# Altium PCB AudioUFO.PcbDoc
Units mil, origin at the board's own origin, x right, y up, seen from the top; angles counter-clockwise.
Board outline 5000 x 5000 mil, 2 copper layers (Top Layer, Bottom Layer), stack 61.7 mil thick; 31 components, 4 nets, 234 pads, 75 vias.
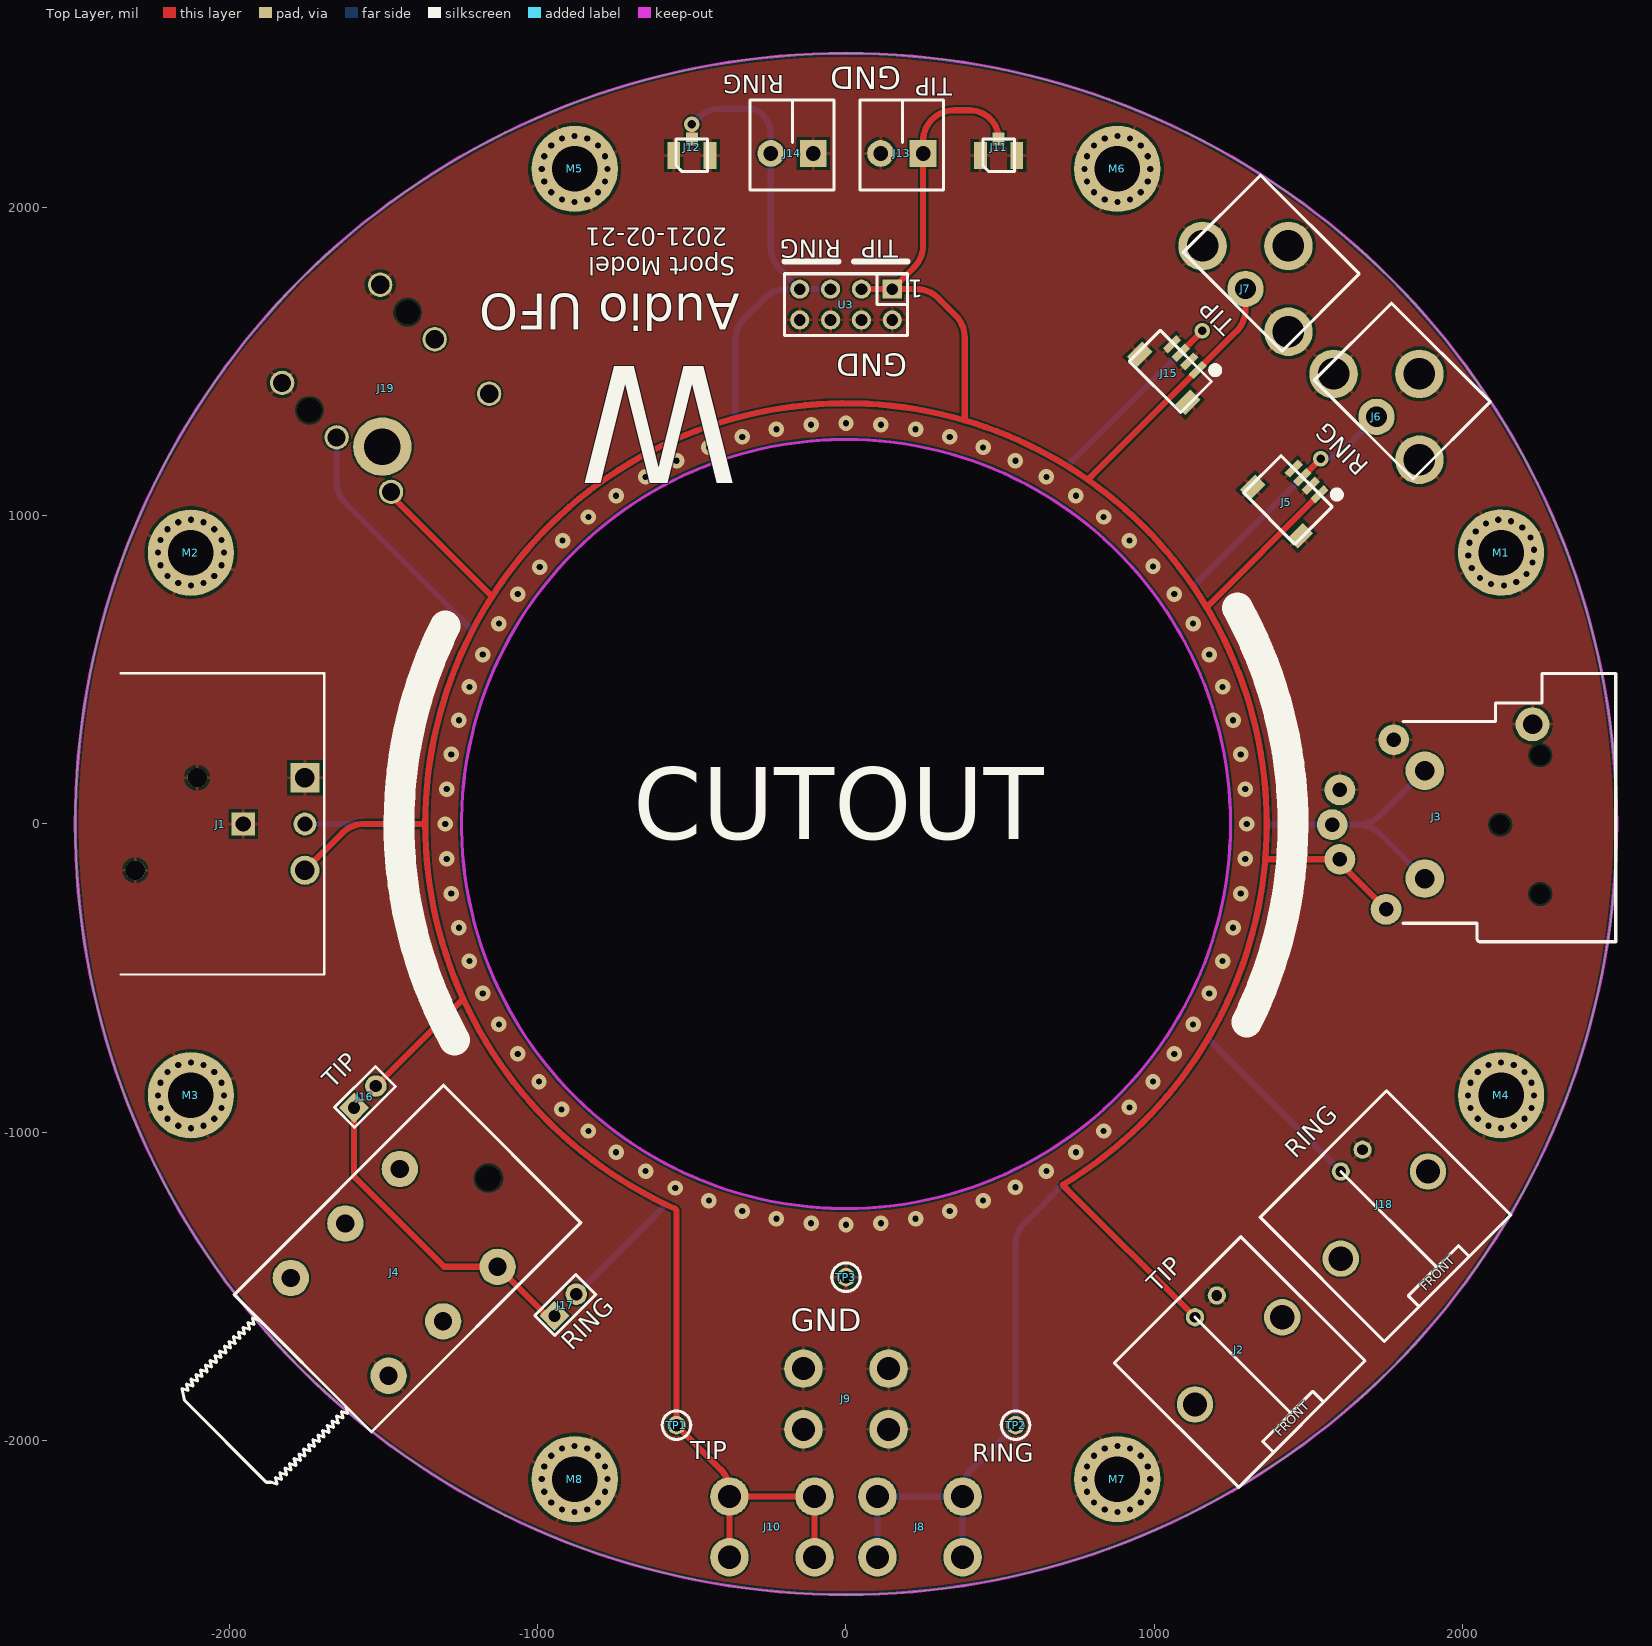
[diagram p0: Top Layer view]
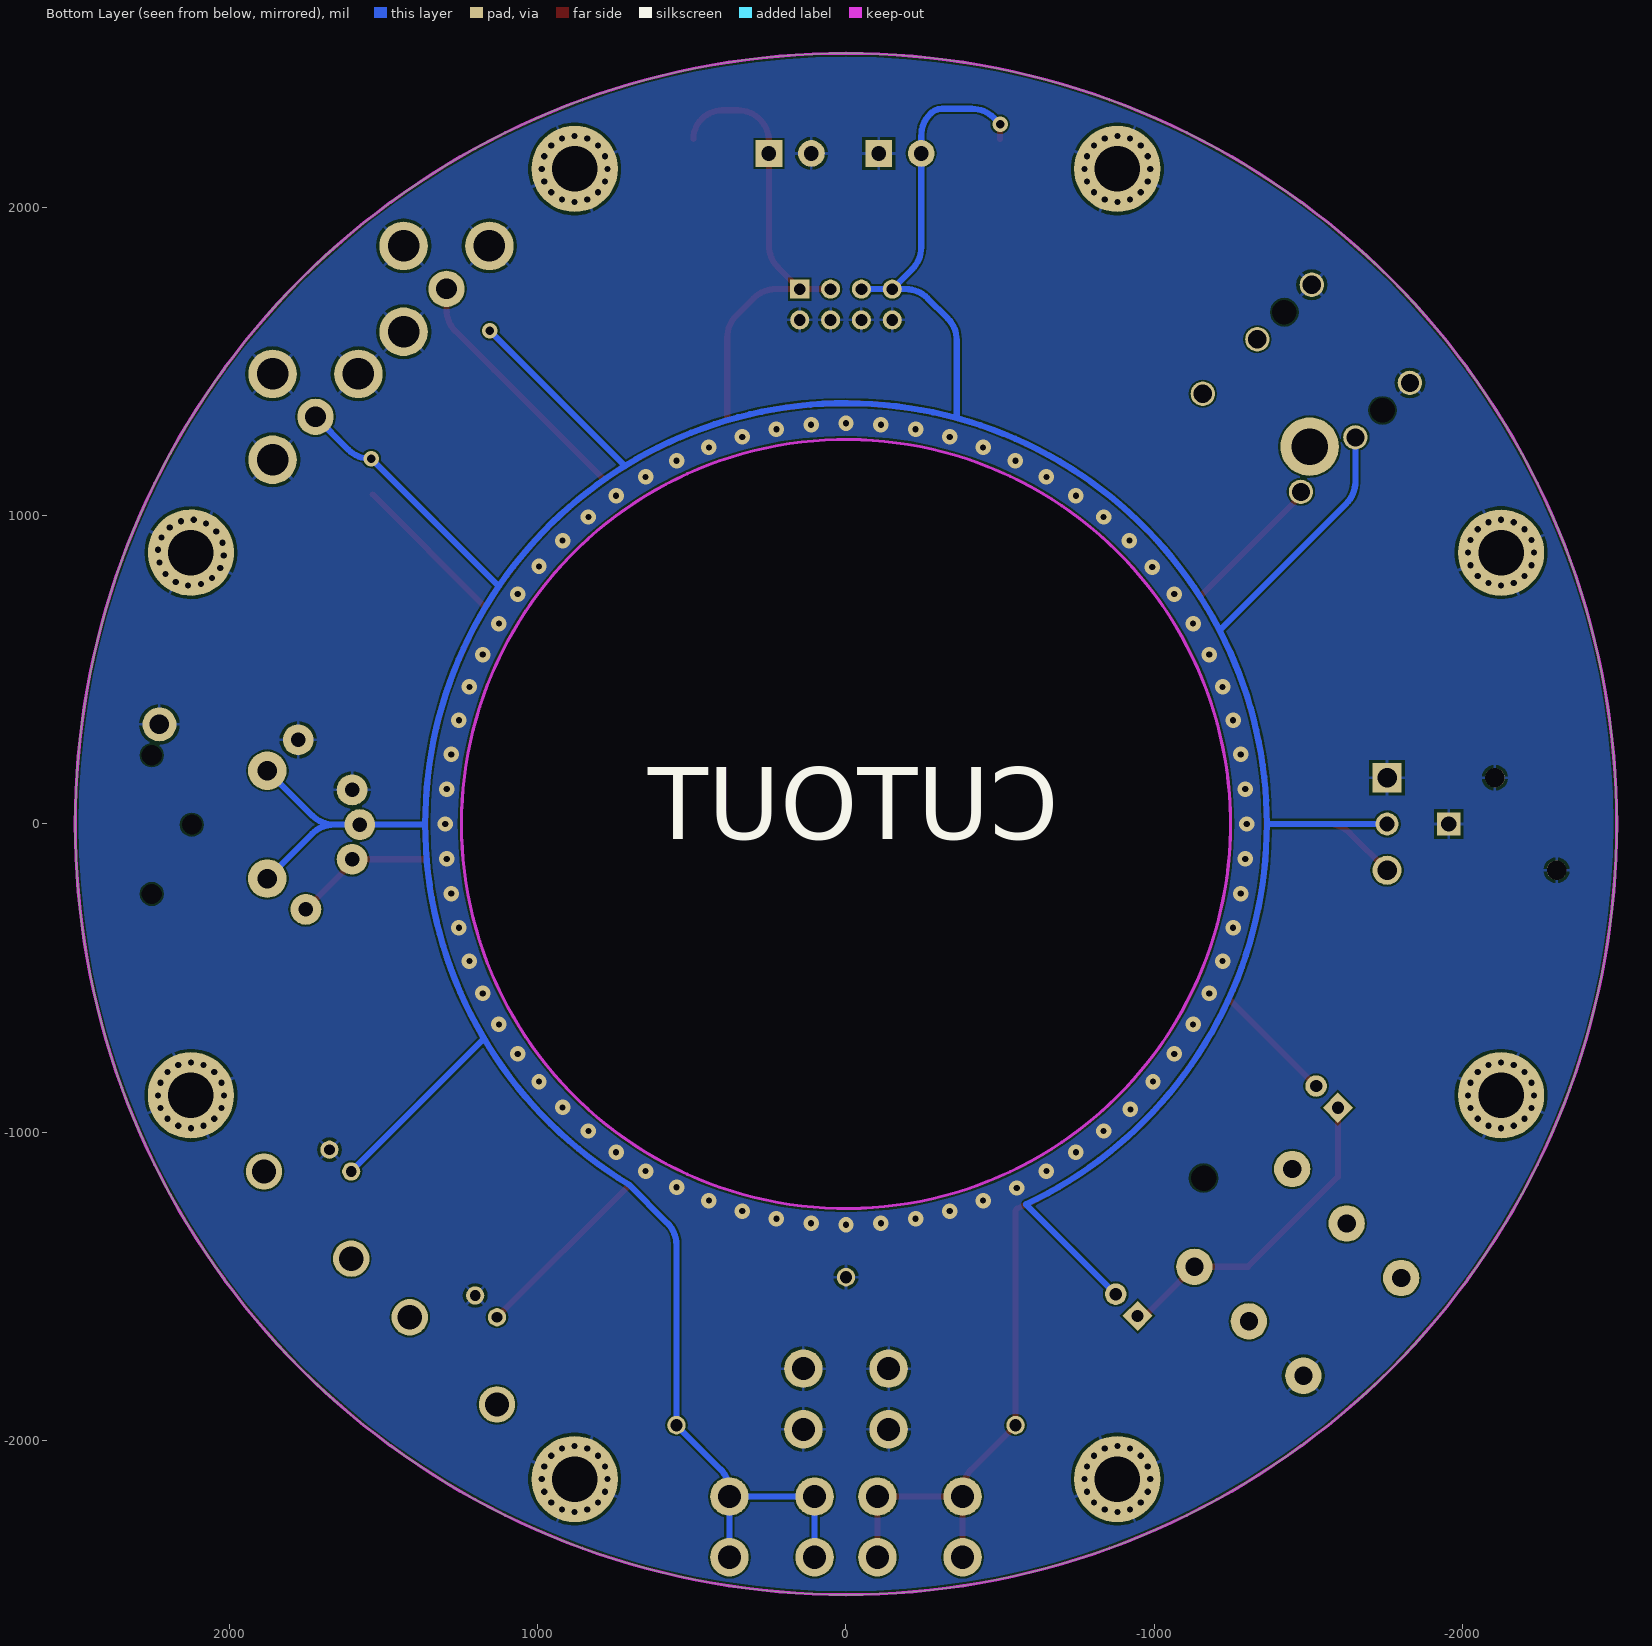
[diagram p1: Bottom Layer view, seen from below]
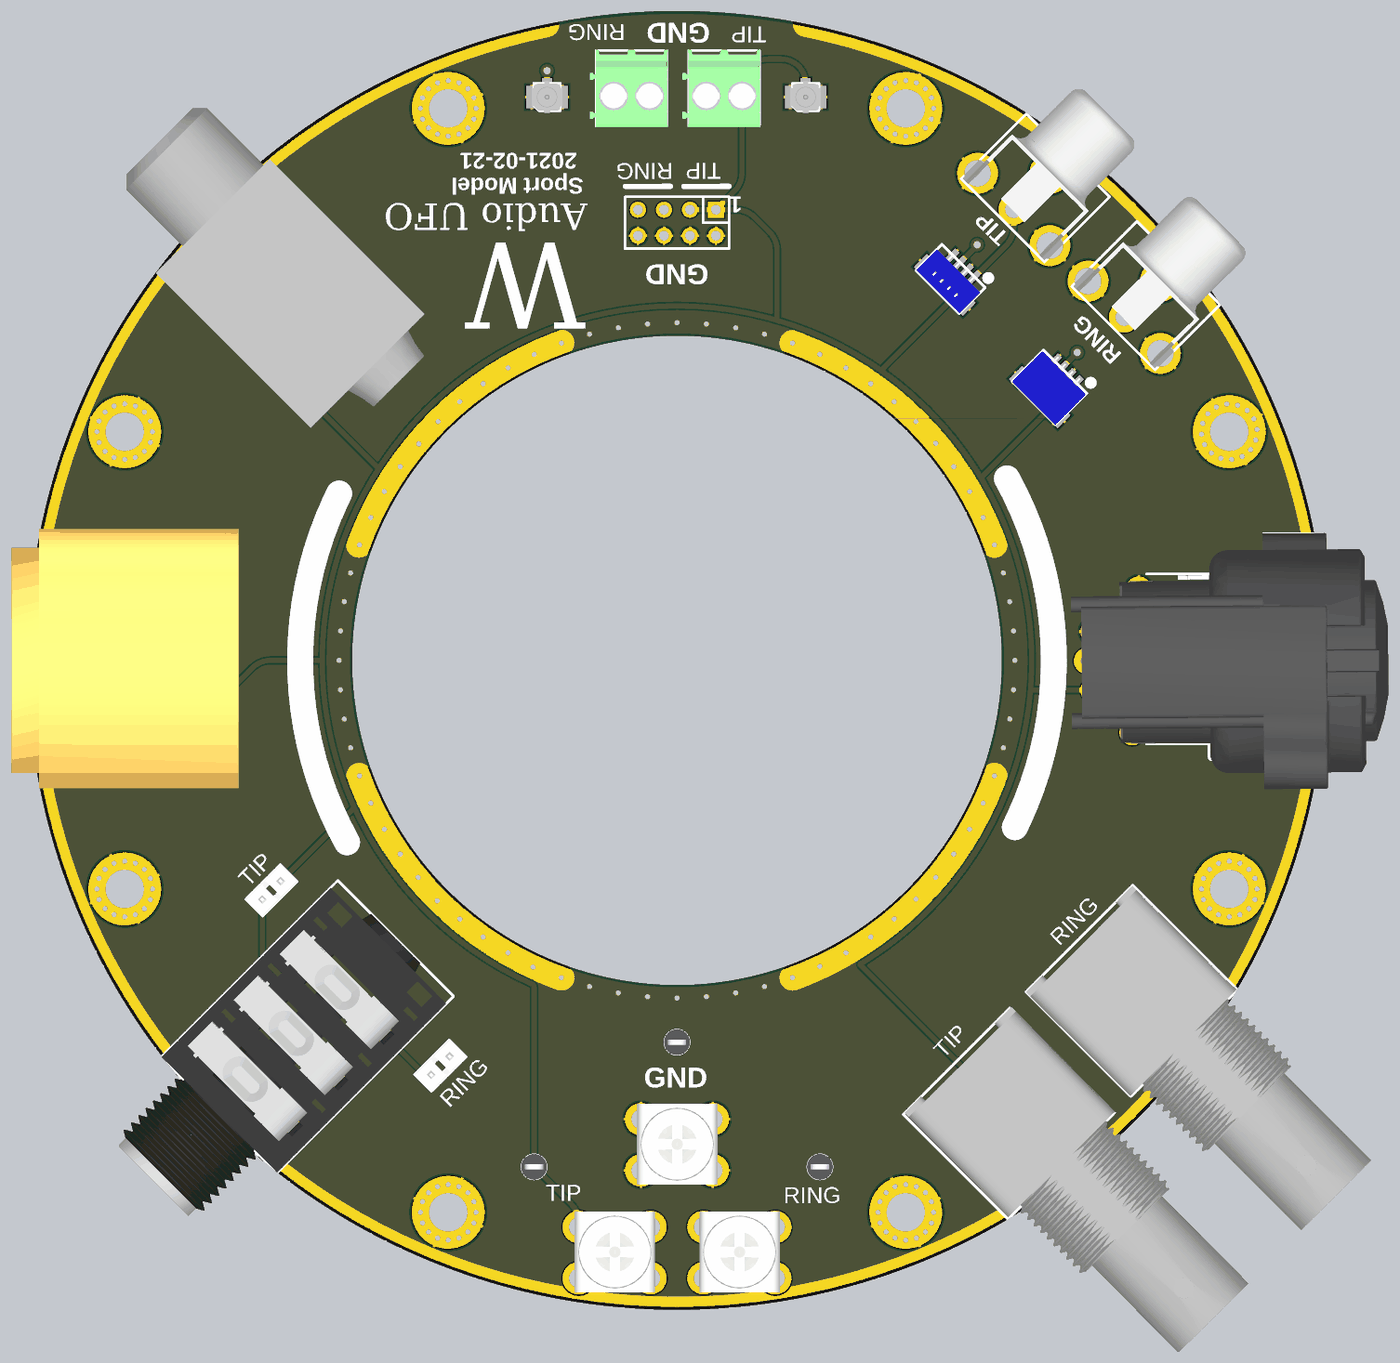
[diagram p2: 3D render of the assembled board from above, using the file's embedded part models]

## Layer stack, top to bottom
Top Solder: solder mask 0.4, Solder Resist, Dk 3.5
Top Layer: signal copper 1.4
Dielectric1: dielectric 58.9, FR-4, Dk 4.8
Bottom Layer: signal copper 1.4
Bottom Solder: solder mask 0.4, Solder Resist, Dk 3.5

## Board outline
-2500,0 ccw(c0,0) 0,-2500 ccw(c0,0) 2500,0 ccw(c0,0) 0,2500 ccw(c0,0)
cut-out: -1250,0 ccw(c0,0) 0,-1250 ccw(c0,0) 1250,0 ccw(c0,0) 0,1250 ccw(c0,0)

## Design rules (kind name [scope] priority, off if disabled: settings)
Clearance [All] p1: gap=6 ignorepadtopadclearanceinfootprint=FALSE except(0: Arc-Hole Track-Hole SMDPad-Hole THPad-Hole Via-Hole Fill-Hole Poly-Hole Region-Hole Text-Hole)
HoleSize [All] p1: absolutevalues=TRUE maxlimit=500 minlimit=1 maxpercent=80.000 minpercent=20.000
PolygonConnect [All] p1: thpad.connectstyle=Relief thpad.reliefconductorwidth=10 thpad.reliefentries=4 thpad.polygonreliefangle="90 Angle" thpad.airgapwidth=10 smdpad.connectstyle=Relief smdpad.reliefconductorwidth=10 smdpad.reliefentries=4 smdpad.polygonreliefangle="90 Angle" smdpad.airgapwidth=10 via.connectstyle=Direct via.reliefconductorwidth=10 via.reliefentries=4 via.polygonreliefangle="90 Angle" via.airgapwidth=10
RoutingVias [All] p1: holewidth=12 width=26 viastyle="Through Hole" minholewidth=12 minwidth=26 maxholewidth=50 maxwidth=75
SilkToSolderMaskClearance SilkscreenOverComponentPads [IsPad] p1: minsilkscreentomaskgap=10 clearancetoexposedcopper=TRUE
SolderMaskExpansion [All] p1: expansion=4 istentingtop=FALSE
Width [All] p1: maxlimit=200 minlimit=6 preferedwidth=6
28 further rules are at their usual default settings.

## Components (designator, comment, footprint, x,y, rotation, side; value= is the part's Value field where it differs from the comment)
J1 "NC3MBH" NC3MBH -1755,0 r90 top
J2 "1-1634612-0" 1-1634612-0 1202.87,-1670.71 r225 top
J3 "NCJ6FA-H-0" NEUTRIK_NCJ6FA-H-0 2502,-2 r270 top
J4 "ACJM-MHDRM" ACJS-MHDR -1401,-1390 r225 top
J5 "SM04B-SRSS-TB(LF)(SN)" SM04B-SRSS-TB(LF)(SN) 1444.68,1061.84 r135 top
J6 "RCJ-012" RCJ-014 1720.81,1320.81 r315 top
J7 "RCJ-013" RCJ-014 1295.81,1735.81 r315 top
J8 "7701" 7701 240,-2280 r270 top
J9 "7701" 7701 0,-1865 r270 top
J10 "7701" 7701 -240,-2280 r270 top
J11 "1909763-1" 1909763-1 495,2195 r180 top
J12 "1909763-1" 1909763-1 -500,2195 r180 top
J13 "1984617" 1984617 181.1,2175 r180 top
J14 "1984617" 1984617 -175,2175 r180 top
J15 "BM04B-SRSS-TBT(LF)(SN)" BM04B-SRSS-TBT(LF)(SN) 1065,1480 r135 top
J16 "3-644456-2" 3-644456-2 -1595.71,-920.71 r45 top
J17 "3-644456-2" 3-644456-2 -945.71,-1595.71 r45 top
J18 "1-1634612-0" 1-1634612-0 1675.71,-1197.87 r225 top
J19 "NRJ6HF-1-AU" NEUTRIK_NRJ6HF-1 -1670,1590 r135 top
M1 "6-32 Hole" "6-32 X 0" 2124.92,880.17 r27.47 top
M2 "6-32 Hole" "6-32 X 0" -2124.92,880.17 r157.5 top
M3 "6-32 Hole" "6-32 X 0" -2124.92,-880.17 r202.5 top
M4 "6-32 Hole" "6-32 X 0" 2124.92,-880.17 r337.5 top
M5 "6-32 Hole" "6-32 X 0" -880.17,2124.92 r112.5 top
M6 "6-32 Hole" "6-32 X 0" 880.17,2124.92 r67.5 top
M7 "6-32 Hole" "6-32 X 0" 880.17,-2124.92 r292.5 top
M8 "6-32 Hole" "6-32 X 0" -880.17,-2124.92 r247.5 top
TP1 "5001" 5001 -550,-1950 r0 top
TP2 "5001" 5001 550,-1950 r0 top
TP3 "5001" 5001 0,-1470 r0 top
U3 "PR20204VBDN" "HEADER 2x4 .100\"" 0,1685 r180 top

## Footprints (in the part's own frame and the unit in brackets; to place one, negate y for a bottom-side part, rotate by r counter-clockwise, add the part's x,y. Pads: shape width x height; smd on the part's side, far side on the other; paste and mask are expansions set on the pad)
1-1634612-0 [mm] "CONN BNC JACK R/A 50 OHM PCB"
  round 1.5 hole 0.89: 1(0,-2.54) 2(-2.54,-2.54)
  round 3 hole 2.01: M1(-5.08,2.54) M2(5.08,2.54)
  silkscreen extent -7.37,-4.57 7.37,9.91, body extent -7.35,-4.57 7.35,30.93, height 15.75
3-644456-2 [mil] "CONN HEADER VERT 2POS .100 TIN"
  rect 70x70 hole 40: 1(0,0)
  round 70 hole 40: 2(100,0)
  silkscreen extent -44,-46 144,46, body extent -44,-46 144,46, height 395
"6-32 X 0" [mil] "6-32 X 0 Length Philip Pan Head Machine Screw"
  round 30 hole 20: 1(-107,0) 1(-98.86,-40.95) 1(-98.86,40.95) 1(-75.66,75.66) 1(-75.66,-75.66) 1(-40.95,98.86) 1(-40.95,-98.86) 1(0,107) 1(0,-107) 1(40.95,98.86) 1(40.95,-98.86) 1(75.66,75.66) 1(75.66,-75.66) 1(98.86,-40.95) 1(98.86,40.95) 1(107,0)
  round 280 hole 148: 1(0,0)
5001 [mil] "Keystone test point - Black"
  round 60 hole 40: 1(0,0)
  silkscreen extent -46,-46 46,46, body extent -50,-50 50,50, height 180
7701 [mil] "Keytone 6-32 Screw terminal"
  round 125 hole 75: 1(-98.5,138) 1(-98.5,-138) 1(98.5,138) 1(98.5,-138)
  body extent -157,-154 153,156, height 318
1909763-1 [mm] "CONN UMCC JACK STR 50OHM SMD"
  rect 1.05x2.2 smd: 1(-1.5,0.675) 2(1.5,0.675)
  rect 1x1.05 smd: 3(0,-0.675)
  silkscreen extent -1.3,-0.67 1.3,2, body extent -1.5,-0.87 1.5,2.23, height 1.24
1984617 [mm] "Phoenix 2-pin 3.5mm screw terminal"
  rect 2.2x2.2 hole 1.2: 1(-1.75,0)
  round 2.2 hole 1.2: 2(1.75,0)
  silkscreen extent -3.45,-4.4 3.45,3, body extent -3.51,-4.5 4.06,3.1, height 9.05
ACJS-MHDR [mm] "1/4\" Phone Jack Sterero"
  round 3 hole 1.5: 1(8.665,-5.7) 2(2.315,-5.7) 3(-4.035,-5.7) 4(8.665,5.7) 5(2.315,5.7) 6(-4.035,5.7)
  round 0 hole 2.1: M(-8.665,0)
  silkscreen extent -11.46,-8.02 21.99,7.98, body extent -11.49,-8 22.02,8, height 12.73
BM04B-SRSS-TBT(LF)(SN) [mm] "CONN WIRE HDR 4POS 1MM ST SMD"
  rect 0.6x1.55 smd: 1(-1.5,-1.238) 2(-0.5,-1.237) 3(0.5,-1.238) 4(1.5,-1.237)
  rect 1.2x1.8 smd: M1(-2.8,1.237) M2(2.8,1.237)
  silkscreen extent -2.97,-2.52 3,2.24, body extent -3,-1.39 3,2.21, height 4.33
"HEADER 2x4 .100\"" [mil]
  rect 62x62 hole 38: 1(-150,-50)
  round 62 hole 38: 2(-150,50) 3(-50,-50) 4(-50,50) 5(50,-50) 6(50,50) 7(150,-50) 8(150,50)
  silkscreen extent -200,-100 200,100
NC3MBH [mil] "NC3MBH"
  round 63 hole 63: 1(-150,550) 1(150,350)
  rect 94.5x94.5 hole 63: 1(150,0)
  round 94.5 hole 63: 2(-150,0)
  round 75 hole 50: 3(0,0)
  rect 75x75 hole 50: G(0,200)
  silkscreen extent -488,-63 489,597, body extent -492,-68 506,806, height 998
NEUTRIK_NCJ6FA-H-0 [mil] "Neutrik 3 Position Female XLR 1/4\" Stereo Combo"
  round 100 hole 47: 1(-275,-725) 2(275,-750) 3(0,-925) R(112.5,-900) S(-112.5,-900)
  round 10 hole 65 unplated mask+30: A(-225,-250) A(0,-380) A(225,-250)
  round 110 hole 63: G(-325,-275)
  round 125 hole 63: T(-175,-625) T(175,-625)
  silkscreen extent -490,-695 380,-5, body extent -492,-984 492,235, height 984
NEUTRIK_NRJ6HF-1 [mm] "Neutrik Slilm Jack 1/4 Stereo Switched"
  round 2 hole 1.5: G(0,-5.715) R(-6.35,5.715) RN(-6.35,-5.715) S(0,5.715) T(-12.7,5.715) TN(-12.7,-5.715)
  round 0.127 hole 2.032 unplated mask+1.016: L1(-3.2,5.715) L2(-3.2,-5.715)
  round 4.826 hole 3: M(-9.55,3.585)
  body extent -20.05,-7.94 13.1,7.81, height 12.7
RCJ-014 [mm] "RCJ-014METAL RIGHT-ANGLE, RCA JACK, YELLOW INSULATOR"
  round 4 hole 2.6: 1(-5,0) 1(0,5) 1(5,0)
  round 3 hole 1.7: 2(0,0)
  silkscreen extent -5.75,-1.5 5.75,7.5, body extent -5.8,-1.4 5.8,13.1, height 13.4
SM04B-SRSS-TB(LF)(SN) [mm] "CONN HEADR SH 4POS SIDE 1MM TIN"
  rect 0.6x1.55 smd: 1(-1.5,-1.769) 2(-0.5,-1.769) 3(0.5,-1.769) 4(1.5,-1.769)
  rect 1.2x1.8 smd: M1(-2.8,1.769) M2(2.8,1.719)
  silkscreen extent -2.97,-3.05 3,2.56, body extent -3,-2.31 3,2.64, height 2.91

## Part data
J1: "XLR 3-Pin Male Right Angle", Manufacturer=NEUTRIK, Manufacturer Part Number=NC3MBH-1, Supplier Part Number 1=10X8735, >NAME=X2, MF=NEUTRIK, MPN=NC3MBH, OC_FARNELL=unknown, OC_NEWARK=91F3470, Pricing 1="100=3.06, 300=2.8, 500=2.6, 1000=2.45 (USD)", Stock 1=0, Supplier 1=Newark
J2 J18: "TE CONNECTIVITY / GREENPAR         1-1634612-0            RF / Coaxial Connector, BNC Coaxial, Right Angle Jack, Solder, 50 ohm, Brass", Colour=Black, Dielectric Material=Polyethylene, Frequency=4GHz, Insulation Resistance=5GR, Manufacturer="TE Connectivity", Max Operating Temperature=85°C, Min Operating Temperature=-55°C, Package Quantity=100, Supplier Part Number 1=A97555-ND, Body Plating=Nickel, ComponentLink1Description=https://datasheet.ciiva.com/1116/1663556-1116594.pdf, ComponentLink1URL=https://datasheet.ciiva.com/1116/1663556-1116594.pdf, ComponentLink2Description=https://datasheet.ciiva.com/1115/1729824-1115699.pdf, ComponentLink2URL=https://datasheet.ciiva.com/1115/1729824-1115699.pdf, ComponentLink3Description=https://datasheet.ciiva.com/642/eng-cd-1634612-e-642773.pdf, ComponentLink3URL=https://datasheet.ciiva.com/642/eng-cd-1634612-e-642773.pdf, ComponentLink4Description=https://datasheet.ciiva.com/30076/eng-ds-6-1773448-5-zdc-rf-coax-50-75-ohm-1007-30076757.pdf, ComponentLink4URL=https://datasheet.ciiva.com/30076/eng-ds-6-1773448-5-zdc-rf-coax-50-75-ohm-1007-30076757.pdf, ComponentLink5Description=https://datasheet.ciiva.com/16547/eng-ds-6-1773448-5-zdc-rf-coax-50-75-ohm-1007-16547606.pdf, ComponentLink5URL=https://datasheet.ciiva.com/16547/eng-ds-6-1773448-5-zdc-rf-coax-50-75-ohm-1007-16547606.pdf, ComponentLink6Description=https://datasheet.ciiva.com/3133/eng-ds-6-1773448-5-zdc-rf-coax-50-75-ohm-1007-3133498.pdf, ComponentLink6URL=https://datasheet.ciiva.com/3133/eng-ds-6-1773448-5-zdc-rf-coax-50-75-ohm-1007-3133498.pdf, ComponentLink7Description=https://datasheet.ciiva.com/11762/0900766b806d6b45-11762972.pdf, ComponentLink7URL=https://datasheet.ciiva.com/11762/0900766b806d6b45-11762972.pdf, Contact Material=Brass, Contact Plating=Gold, Depth=14.7mm, ELV=Compliant, Fastening Type=Bayonet, Gender=Female, Housing Material=Polyester, Insulation Material=Polyethylene, Length=34.9mm, Manufacturer Part Number=1-1634612-0, Max Frequency=4GHz, Mount=Panel, Orientation="Right Angle", Plating=Nickel, Polarity=Normal, Pricing 1="1=1.62, 10=1.47, 25=1.38, 50=1.32, 100=1.26, 250=1.14, 500=1.05, 1000=0.9 (USD)", Radiation Hardening=No, REACH SVHC=Unknown, Stock 1=5894, Supplier 1=Digi-Key, Termination=Solder, Wire/Cable Type=Coaxial
J3: "XLR Connectors A SERIES COMBO;3POLE FEM;NOLATCH;RET SPRG", Current Rating="3 A", Manufacturer=Neutrik, Supplier Part Number 1=568-NCJ6FA-H-0, Voltage="50 V", Category=Connectors, CategorySort=800, ComponentLink1Description=http://www.neutrik.us/en-us/plugs-jacks/jacks/combo-a-series/ncj6fa-h-0, ComponentLink1URL=http://www.neutrik.us/en-us/plugs-jacks/jacks/combo-a-series/ncj6fa-h-0, Contact Material=Bronze, Contact Plating=Gold, Gender=Female, Manufacturer Part Number=NCJ6FA-H-0, Minimum Order Quantity=1, Mounting Style=PCB, Number of Positions / Contacts=3, Orientation=Horizontal, Pricing 1="1=2.18, 10=2.11, 25=1.98, 50=1.93, 100=1.80, 200=1.76, 500=1.68, 1000=1.62, 2000=1.51 (USD)", Product Category="XLR Panel Mount Connectors", Product Type=Connectors, Reeling=False, RoHS="RoHS Compliant", RoHS - Mouser=Y, Standard="Standard XLR", Standard Pack Qty=10, Stock 1=0, Supplier 1=Mouser, Termination Style=Solder
J4: "Phone Connectors 1/4\"HOR Snap-fit CHASSIS CONN", Color=Black, Manufacturer="Amphenol Audio", Supplier Part Number 1=523-ACJM-MHDRM, Category="Phone Connectors", ComponentLink1Description=http://www.amphenolaudio.com/catalogue/Amphenol_Phone_Plugs_Jacks.pdf, ComponentLink1URL=http://www.amphenolaudio.com/catalogue/Amphenol_Phone_Plugs_Jacks.pdf, Gender=Female, Manufacturer Part Number=ACJM-MHDRM, Minimum Order Quantity=1, Mounting Style=PCB, Number of Positions / Contacts=1, Orientation=Horizontal, Pricing 1="1=1.77, 10=1.66, 50=1.53, 100=1.33 (AUD)", Reeling=False, Series="M Series", Standard="1/4 in", Stock 1=9, Supplier 1=Mouser, Switch Configuration=Switched, Termination Style=Solder
J5: "Conn Shrouded Header HDR 4 POS 1mm Solder RA SMD T/R", Colour=Natural, Contact Resistance=40mR, Housing Colour=Beige, Manufacturer=JST, Max Current Rating=1A, Max Operating Temperature=85°C, Max Voltage Rating (AC)=50V, Min Operating Temperature=-25°C, Supplier Part Number 1=455-1804-1-ND, ComponentLink1Description=https://datasheet.ciiva.com/26894/getdatasheetpartid-499363-26894945.pdf, ComponentLink1URL=https://datasheet.ciiva.com/26894/getdatasheetpartid-499363-26894945.pdf, ComponentLink2Description=https://datasheet.ciiva.com/26894/getdatasheetpartid-640736-26894676.pdf, ComponentLink2URL=https://datasheet.ciiva.com/26894/getdatasheetpartid-640736-26894676.pdf, ComponentLink3Description=https://datasheet.ciiva.com/16487/jstsm04b-srss-tb-lf-sn-16487222.pdf, ComponentLink3URL=https://datasheet.ciiva.com/16487/jstsm04b-srss-tb-lf-sn-16487222.pdf, Connector Type="Male Pin", Contact Material="Copper Alloy", Contact Plating=Copper,Tin, Depth=4.95mm, Housing Material=Polyamide, Lead Free="Lead Free", Length=6mm, Manufacturer Part Number=SM04B-SRSS-TB(LF)(SN), Max Voltage Rating (DC)=50V, Mount="Surface Mount", Number of Contacts=4, Number of Positions=4, Number of Rows=1, Orientation="Right Angle", Packaging="Tape and Reel", Pitch=0.039inch, Pricing 1="1=0.61, 10=0.569, 100=0.436, 500=0.37914, 1000=0.31279 (USD)", Stock 1=43886, Supplier 1=Digi-Key, Termination=Solder
J6: "CONN RCA JACK METAL R/A YEL PCB", Color - Contact=Red, Current Rating=-, Housing Color=Silver, Manufacturer="CUI Inc", Operating Temperature="-20°C ~ 85°C", Supplier Part Number 1=490-RCJ-012, Category="Connectors, Interconnects", ComponentLink1Description=http://products.cui.com/GetSpecForDigiKey.aspx?MFGNum=RCJ-014, ComponentLink1URL=http://products.cui.com/GetSpecForDigiKey.aspx?MFGNum=RCJ-014, Connector Type="Phono (RCA) Jack", Contact Material=Brass, Contact Material - Plating=Tin, Features="Board Lock", Gender=Female, Housing Material=Steel, Internal Switch(s)="Does Not Contain Switch", Manufacturer Part Number=RCJ-012, Mounting Type="Through Hole, Right Angle", Number of Positions/Contacts="2 Conductors, 2 Contacts", Packaging=Bulk, Plug/Mating Plug Diameter="3.20mm ID, 9.00mm OD (RCA)", Pricing 1="1=0.96, 10=0.746, 100=0.5693, 500=0.4554, 1000=0.4048, 2500=0.33649 (USD)", RoHS="RoHS Compliant", Shielding=Unshielded, Signal Lines=Mono, Stock 1=17644, Supplier 1=Mouser, Termination=Solder, Voltage - Rated=-
J7: "CONN RCA JACK METAL R/A WHITE PCB", Color - Contact=White, Current Rating=-, Housing Color=Silver, Manufacturer="CUI Inc", Operating Temperature="-20°C ~ 85°C", Supplier Part Number 1=CP-1402-ND, Category="Connectors, Interconnects", ComponentLink1Description=http://products.cui.com/GetSpecForDigiKey.aspx?MFGNum=RCJ-014, ComponentLink1URL=http://products.cui.com/GetSpecForDigiKey.aspx?MFGNum=RCJ-014, Connector Type="Phono (RCA) Jack", Contact Material=Brass, Contact Material - Plating=Tin, Features="Board Lock", Gender=Female, Housing Material=Steel, Internal Switch(s)="Does Not Contain Switch", Manufacturer Part Number=RCJ-013, Mounting Type="Through Hole, Right Angle", Number of Positions/Contacts="2 Conductors, 2 Contacts", Packaging=Bulk, Plug/Mating Plug Diameter="3.20mm ID, 9.00mm OD (RCA)", Pricing 1="1=0.96, 10=0.746, 100=0.5693, 500=0.4554, 1000=0.4048, 2500=0.33649 (USD)", RoHS="RoHS Compliant", Shielding=Unshielded, Signal Lines=Mono, Stock 1=17644, Supplier 1=Digi-Key, Termination=Solder, Voltage - Rated=-
J8 J9 J10: "TERM W/ASSEMBLD SCREW VERT PCMNT", Current Rating=15A, Manufacturer="Keystone Electronics", Supplier Part Number 1=7701K-ND, Category="Connectors, Interconnects", ComponentLink1Description=http://www.keyelco.com/product-pdf.cfm?p=1081, ComponentLink1URL=http://www.keyelco.com/product-pdf.cfm?p=1081, Contact Finish=Tin, Contact Material=Brass, Features=-, Manufacturer Part Number=7701, Material - Insulation=-, Mounting Type="Through Hole", Number of Legs=4, Pricing 1="1=0.49, 10=0.462, 50=0.449, 100=0.354, 250=0.32324, 500=0.30784, 1000=0.256, 2500=0.23088, 5000=0.22318 (USD)", RoHS="RoHS Compliant", Screw Finish=Nickel, Screw Material=Brass, Screw Size=6-32, Stock 1=77817, Supplier 1=Digi-Key, Terminal Type="Screw Terminal, Power Tap", Termination=Solder
J11 J12: "CONN UMCC JACK STR 50OHM SMD", Dielectric Material="Liquid Crystal Polymer (LCP)", Housing Color=Ivory, Manufacturer="TE Connectivity AMP Connectors", Operating Temperature="-40°C ~ 90°C", Supplier Part Number 1=A118077CT-ND, Voltage Rating=60V, Body Finish=Gold, Body Material="Copper Alloy", Cable Group=-, Category="Connectors, Interconnects", Center Contact Material="Copper Alloy", Center Contact Plating=Gold, ComponentLink1Description=http://www.te.com/commerce/DocumentDelivery/DDEController?Action=srchrtrv&DocNm=1909763&DocType=Customer+Drawing&DocLang=English, ComponentLink1URL=http://www.te.com/commerce/DocumentDelivery/DDEController?Action=srchrtrv&DocNm=1909763&DocType=Customer+Drawing&DocLang=English, Connector Style="Ultra Miniature Coaxial", Connector Type="Jack, Male Pin", Contact Termination=Solder, Fastening Type=Snap-On, Features=-, Impedance="50 Ohm", Includes=-, Ingress Protection=-, Insertion Loss=0.24dB, Manufacturer Part Number=1909763-1, Mating Cycles=30, Mounting Feature=-, Mounting Type="Surface Mount", Packaging="Cut Tape (CT)", Part Status=Active, Pricing 1="1=0.49, 10=0.462, 25=0.416, 50=0.3696, 100=0.3542, 250=0.3234, 500=0.308, 1000=0.2541, 2500=0.231 (USD)", RoHS="RoHS Compliant", Shield Termination=Solder, Stock 1=75031, Supplier 1=Digi-Key
J13 J14: "CONN TERM BLOCK T/H 2POS 3.5MM", Color=Green, Current=10A, Manufacturer="Phoenix Contact", Operating Temperature=-, Supplier Part Number 1=277-1721-ND, Voltage=300V, Category="Connectors, Interconnects", Clamp Material - Plating=-, ComponentLink1Description=http://media.digikey.com/pdf/Data%20Sheets/Phoenix%20Contact%20PDFs/1984617.pdf, ComponentLink1URL=http://media.digikey.com/pdf/Data%20Sheets/Phoenix%20Contact%20PDFs/1984617.pdf, Contact Material - Plating=-, Features="Interlocking (Side)", Housing Material="Polyamide (PA), Nylon", Manufacturer Part Number=1984617, Mating Orientation="Horizontal with Board", Mounting Type="Through Hole", Number of Levels=1, Packaging=Bulk, Pitch="0.138\" (3.50mm)", Positions Per Level=2, Pricing 1="1=0.34, 10=0.322, 50=0.308, 100=0.2996, 250=0.28, 500=0.2576, 1000=0.238 (USD)", RoHS="RoHS Compliant", Screw Material - Plating=-, Screw Thread=M2, Stock 1=10915, Supplier 1=Digi-Key, Torque - Screw="0.22-0.25 Nm (1.9-2.2 Lb-In)", Wire Gauge="16-26 AWG", Wire Termination="Screw - Rising Cage Clamp"
J15: "1.0mm Pitch, Ultra-Compact, Low Profile Design, Interchangeable Shrouded Header", Colour=Natural, Manufacturer=JST, Package Quantity=1, Supplier Part Number 1=455-2874-1-ND, ComponentLink1Description=https://datasheet.ciiva.com/16210/esr-16210536.pdf, ComponentLink1URL=https://datasheet.ciiva.com/16210/esr-16210536.pdf, Connector Type="Male Pin", Contact Plating=Tin, Lead Free="Lead Free", Manufacturer Part Number=BM04B-SRSS-TBT(LF)(SN), Mount="Surface Mount", Number of Positions=4, Number of Rows=1, Packaging="Tape and Reel", Pitch=0.039inch, Pricing 1="1=0.81, 10=0.715, 100=0.617, 500=0.50486 (USD)", Stock 1=798, Supplier 1=Digi-Key, Termination=Solder
J16 J17: "CONN HEADER VERT 2POS .100 TIN", Color=Natural, Manufacturer="TE Connectivity", Supplier Part Number 1=A31112-ND, Category="Connectors, Interconnects", ComponentLink1Description=http://documents.tycoelectronics.com/commerce/DocumentDelivery/DDEController?Action=srchrtrv&DocNm=644456&DocType=CD&DocLang=EN, ComponentLink1URL=http://documents.tycoelectronics.com/commerce/DocumentDelivery/DDEController?Action=srchrtrv&DocNm=644456&DocType=CD&DocLang=EN, Connector Type="Header, Unshrouded", Contact Finish=Tin, Contact Finish Thickness="150µin (3.81µm)", Contact Mating Length="0.295\" (7.49mm)", Contact Type="Male Pin", Fastening Type=-, Features=-, Manufacturer Part Number=3-644456-2, Mounting Type="Through Hole", Number of Positions=2, Number of Positions Loaded=All, Number of Rows=1, Packaging=Bulk, Pitch="0.100\" (2.54mm)", Pricing 1="1=0.21, 10=0.196, 25=0.1676, 50=0.1466, 100=0.1362, 250=0.12044, 500=0.11522, 1000=0.09427, 2500=0.08641 (USD)", RoHS="RoHS Compliant", Row Spacing=-, Stock 1=15628, Supplier 1=Digi-Key, Termination=Solder
J19: "Phone Connectors 1/4\" JACK STEREO SW SLIM-FULL THREAD NSE", Color=Black, Contact Rating="3 A", Manufacturer=Neutrik, Supplier Part Number 1=568-NRJ6HF-1-AU, Voltage Rating="50 V", Brand=Neutrik, Category=Connectors, CategorySort=800, Contact Material=Bronze, Contact Plating=Gold, Gender=Female, Manufacturer Part Number=NRJ6HF-1-AU, Minimum Order Quantity=1, Mounting Style="Through Hole", Number of Positions="3 (TRS, Stereo)", Orientation=Horizontal, Pricing 1="1=1.53, 10=1.51, 25=1.40, 50=1.39, 100=1.29, 200=1.18, 500=1.12 (USD)", Reeling=False, RoHS="RoHS Compliant", RoHS - Mouser=Y, Series="Slim Jack", Standard="1/4 in", Standard Pack Qty=200, Stock 1=1463, Supplier 1=Mouser
TP1 TP2 TP3: "KEYSTONE - 5001 - TEST POINT, CONNECTOR, BLACK", Color=Black, Flammability Rating="UL94 V-0", Manufacturer="Keystone Electronics", Package Quantity=100, Supplier Part Number 1=36-5001-ND, Body Material=PBT,Bronze, Category="Test Probes, Leads and Clips", ComponentLink1Description=https://datasheet.ciiva.com/27052/1581986-27052611.pdf?src-supplier=Jameco, ComponentLink1URL=https://datasheet.ciiva.com/27052/1581986-27052611.pdf?src-supplier=Jameco, ComponentLink2Description=https://datasheet.ciiva.com/11836/0900766b8009b7c7-11836045.pdf?src-supplier=RSComponents, ComponentLink2URL=https://datasheet.ciiva.com/11836/0900766b8009b7c7-11836045.pdf?src-supplier=RSComponents, ComponentLink3Description=https://datasheet.ciiva.com/16318/m60-2p60-16318423.pdf?src-supplier=Future+Electronics, ComponentLink3URL=https://datasheet.ciiva.com/16318/m60-2p60-16318423.pdf?src-supplier=Future+Electronics, ComponentLink4Description=https://datasheet.ciiva.com/22631/1703983-22631100.pdf?src-supplier=Element14, ComponentLink4URL=https://datasheet.ciiva.com/22631/1703983-22631100.pdf?src-supplier=Element14, Contact Material=Bronze, Contact Plating=Silver,Tin, Diameter=2.54mm, Height=0.3inch, Hole Diameter=1.6mm, Housing Color=Black, Inside Diameter=1.27mm, Insulation=Insulated, Lead Free="Lead Free", Length=7.62mm, Manufacturer Part Number=5001, Material=Nylon,Bronze,Silver, Mount="Through Hole,PCB", Number of Contacts=1, Number of Ports=1, Orientation=Straight, Outside Diameter=2.54mm, Packaging=Bulk, Plating=Silver, Pricing="1=0.35000, 10=0.33500, 50=0.24380, 250=0.21032, 1000=0.17140, 2500=0.15296, 5000=0.14340 (USD)", REACH SVHC="No SVHC", RoHS=Yes, Stock=463593, Supplier 1=Digi-Key, Termination="Through Hole"
U3: "2x4 Header .100\"", Manufacturer="METZ CONNECT", Supplier Part Number 1=1849-PR20204VBDN-ND, Manufacturer Part Number=PR20204VBDN, Pricing="1=0.16000, 10=0.15400, 100=0.09510, 500=0.07872, 1000=0.06888, 5000=0.05904, 10000=0.05740 (USD)", RoHS=No, Stock=3387, Supplier 1=Digi-Key
M1 M2 M3 M4 M5 M6 M7 M8: Source=Digikey

## Via types
v1: diameter 50, hole 20, Top Layer to Bottom Layer, 72 vias
v2: diameter 50, hole 28, Top Layer to Bottom Layer, tented both sides, 3 vias

## Nets (pads, with @x,y where several pads share a name; then routed paths per layer and width w, separated by ;. In a path a pad name is that pad's centre, name@x,y a point inside that pad or via, vN(x,y) a via of type N, cw(c..) or ccw(c..) an arc to the next point about the centre after c; other vN are vias at no path point)
GND: J1.1 J1.G J2.2 J3.1 J3.G J3.S J4.4 J5.2 J5.4 J5.M1 J5.M2 J6.1 J7.1 J9.1 J11.1 J11.2 J12.1 J12.2 J13.2 J14.1 J15.2 J15.4 J15.M1 J15.M2 J18.2 J19.G J19.S M1.1 M2.1 M3.1 M4.1 M5.1 M6.1 M7.1 M8.1 TP3.1 U3.2 U3.4 U3.6 U3.8
  other v1: 0,-1300 -113.3,-1295.05 113.3,-1295.05 -225.74,-1280.25 225.74,-1280.25 -336.46,-1255.7 336.46,-1255.7 -444.63,-1221.6 444.63,-1221.6 -553.86,-1180.75 549.4,-1178.2 -650,-1125.83 650,-1125.83 -745.65,-1064.9 745.65,-1064.9 -835.62,-995.86 835.62,-995.86 -922.67,-925.71 919.24,-919.24 -995.86,-835.62 995.86,-835.62 -1064.9,-745.65 1064.9,-745.65 -1125.83,-650 1125.83,-650 -1178.2,-549.4 1178.2,-549.4 -1221.6,-444.63 1221.6,-444.63 -1255.7,-336.46 1255.7,-336.46 -1280.25,-225.74 1280.25,-225.74 -1295.05,-113.3 1295.05,-113.3 -1300,0 1300,0 -1295.05,113.3 1295.05,113.3 -1280.25,225.74 1280.25,225.74 -1255.7,336.46 1255.7,336.46 -1221.6,444.63 1221.6,444.63 -1178.2,549.4 1178.2,549.4 -1125.83,650 1125.83,650 -1064.9,745.65 1064.9,745.65 -993.17,833.16 995.86,835.62 -919.24,919.24 919.24,919.24 -835.62,995.86 835.62,995.86 -745.65,1064.9 745.65,1064.9 -650,1125.83 650,1125.83 -549.4,1178.2 549.4,1178.2 -444.63,1221.6 444.63,1221.6 -336.46,1255.7 336.46,1255.7 -225.74,1280.25 225.74,1280.25 -113.3,1295.05 113.3,1295.05 0,1300
NetJ4_6: J4.6 J16.1 J17.1 | length 1060.6
  Top Layer w20: J16.1 -1595.71,-1144.29 -1303.65,-1436.35 J4.6 -970.63,-1595.71 J17.1
RING: J1.3 J3.3 J3.T J5.3 J6.2 J8.1 J12.3 J14.2 J15.3 J17.2 J18.1 J19.R TP2.1 U3.5 U3.7 | length 15295.3
  Top Layer w20: J12.3 v2(-500,2270) ; J15.3 v2@1153.47,1596.31 ; v2@1153.48,1596.32 ccw(c1149.78,1600) v2(1155,1600) ; J5.3 v2(1540,1185)
  Bottom Layer w20: J1.3 -1365.08,0 ; J19.R -1652.32,1110.26 ccw(c-1552.32,1110.26) -1623.03,1039.55 -1211.85,628.37 ; J17.2 -584.87,-1234.87 ccw(c-586.06,-1233.67) -584.37,-1233.67 cw(c0,0) -1365.08,0 ; v2(-500,2270) -479.29,2290.71 cw(c-408.58,2220) -408.58,2320 -311.21,2320 cw(c-311.21,2268.79) -275.01,2305.01 -273.19,2303.19 cw(c-343.9,2232.48) -243.9,2232.48 J14.2 -243.9,1870.32 ccw(c-143.9,1870.32) -214.61,1799.61 U3.7 ; U3.5 U3.7 ; J8.1@102,-2378.5 102,-2181.5 J8.1@378,-2181.5 ; J8.1@378,-2378.5 J8.1@378,-2181.5 ; v2(1155,1600) 717.62,1162.62 cw(c716.27,1163.98) 716.27,1162.06 ; 1175.96,-698.12 J18.1 ; J6.2 1614.29,1214.29 cw(c1543.58,1285) 1543.58,1185 v2(1540,1185) 1133.13,778.13 cw(c1124.15,787.12) 1124.15,774.42 ; J3.T@1877,-177 1731.29,-31.29 ccw(c1660.58,-102) 1660.58,-2 ; J3.T@1877,173 1731.29,27.29 cw(c1660.58,98) 1660.58,-2 ; -1365.08,0 cw(c0,0) -1211.85,628.37 ; -1211.85,628.37 cw(c0,0) -359.18,1316.98 ; -359.18,1316.98 cw(c0,0) 716.27,1162.06 ; -359.18,1316.98 -359.18,1569.56 cw(c-259.56,1569.56) -330,1640 -264.29,1705.71 cw(c-193.58,1635) -193.58,1735 U3.7 ; J8.1@378,-2181.5 378,-2163.42 cw(c478,-2163.42) 407.29,-2092.71 TP2.1 550,-1365.19 cw(c650,-1365.19) 579.29,-1294.48 704.58,-1169.19 ccw(c0,0) 1365.08,0 ; 716.27,1162.06 cw(c0,0) 1124.15,774.42 ; 1124.15,774.42 cw(c0,0) 1365.08,0 ; 1365.08,0 ccw(c1369.91,4.83) 1369.91,-2 J3.3 1660.58,-2
TIP: J1.2 J2.1 J3.2 J3.R J5.1 J7.2 J10.1 J11.3 J13.1 J15.1 J16.2 J19.T TP1.1 U3.1 U3.3 | length 14231.3
  Top Layer w20: J1.2 -1634.29,-29.29 cw(c-1563.58,-100) -1563.58,0 -1365.01,0 ; J16.2 -1244.72,-569.72 cw(c-1241.25,-573.19) -1241.25,-568.28 ; J19.T ccw(c-1447.05,1077.35) -1467.2,1057.2 -1150,740 ; J10.1@-378,-2378.5 J10.1@-378,-2181.5 ; J10.1@-102,-2378.5 -102,-2181.5 J10.1@-378,-2181.5 ; U3.3 U3.1 ; J11.3 ccw(c401.57,2221.57) 401.57,2315 350,2315 ccw(c350,2215) 250,2215 J13.1 250,1876.42 cw(c150,1876.42) 220.71,1805.71 U3.1 ; 786.49,1117.97 ccw(c788.57,1115.9) 785.63,1115.9 ; 786.49,1117.98 J15.1 1266.52,1598 ccw(c1195.81,1668.71) 1295.81,1668.71 J7.2 ; J2.1 706.82,-1174.67 cw(c712.07,-1169.42) 704.65,-1169.42 ccw(c0,-0.36) 1360.18,-115.02 ; J5.1 1171.58,705.23 ccw(c1174.62,702.2) 1170.33,702.2 ; J3.2 1610.84,-135.84 cw(c1632.18,-114.5) J3.R 1361.43,-114.5 ccw(c1361.43,-116.26) 1360.18,-115.02 ; -1365.01,0 ccw(c0,-0.36) -1241.25,-568.28 ; -1365.01,0 cw(c0,-0.36) 383.45,1309.69 ; -1241.25,-568.28 ccw(c0,-0.36) -554.05,-1247.86 cw(c-563.83,-1257.64) -550,-1257.64 TP1.1 -407.29,-2092.71 cw(c-478,-2163.42) -378,-2163.42 J10.1@-378,-2181.5 ; U3.1 228.58,1735 cw(c228.58,1635) 299.29,1705.71 355.71,1649.29 cw(c285,1578.58) 385,1578.58 385,1313.44 cw(c379.69,1313.44) 383.45,1309.69 ; 383.45,1309.69 cw(c0,-0.36) 785.63,1115.9 ; 785.63,1115.9 cw(c0,-0.36) 1170.33,702.2 ; 1170.33,702.2 cw(c0,-0.36) 1365.01,-0.36 cw(c0,-0.36) 1360.18,-115.02
pads on no net: J2.M1 J2.M2 J3.A J4.1 J4.2 J4.3 J4.5 J4.M J18.M1 J18.M2 J19.L1 J19.L2 J19.M J19.RN J19.TN

## Polygon pours and split planes (outlines as drawn)
GND on Top Layer "GND_L01_P000" (solid, remove dead copper, pour order 0): -2875,-2940 -2875,2835 3910,2835 3910,-2940
GND on Bottom Layer "GND_L02_P001" (solid, remove dead copper, pour order 1): 3235,2735 3235,-3355 -3520,-3355 -3520,2735

## Keep-outs
Keep-Out Layer:
  circle w10: c0,0 r1247.26
  lines w10: -2500,0 cw(c0,0) 0,2500 cw(c0,0) 2500,0 cw(c0,0) 0,-2500 cw(c0,0) -2500,0

## Silkscreen, mask and mechanical layers (free items; w line width, h text height)
Top Overlay:
  lines w20: -198.89,1824.77 -25,1825 ; 26.11,1824.77 200,1825
  lines w100: -1299.96,642.34 ccw(c0,0) -1269.59,-700.46 ; 1269.59,700.46 cw(c0,0) 1299.96,-642.34
  text "GND" at 178.81,2480 h125 r180
  text "RING" at -200,2448.96 h100 r180
  text "TIP" at 345,2440 h100 r180
  text "2021-02-21" at -385,1953.82 h100 r180
  text "TIP" at 170,1915 h100 r180
  text "RING" at -15,1913.96 h100 r180
  text "Sport Model" at -360,1857.37 h100 r180
  text "Audio UFO" at -345,1759.45 h200 r180
  text "TIP" at 1280,1635 h100 r135
  text "W" at -350,1610 h650 r180
  text "GND" at 198.81,1550 h125 r180
  text "RING" at 1714.17,1179.17 h100 r135
  text "CUTOUT" at -690,-125.83 h400
  text "TIP" at -1650,-875 h100 r45
  text "RING" at 1471.26,-1102.26 h100 r45
  text "TIP" at 1025,-1536 h100 r45
  text "GND" at -178.81,-1670 h125
  text "RING" at -875.74,-1724.26 h100 r45
  text "TIP" at -505,-2080 h100
  text "RING" at 410,-2088.96 h100
Bottom Overlay:
  text "CUTOUT" at -690,-125.83 h400
Top Solder:
  lines w100: -1223.11,445.18 cw(c-1.49,0.62) -445,1222.63 ; -1222.68,-445.1 ccw(c-1.49,0.62) -444.6,-1221.53 ; -502.73,2448.93 ccw(c0,0) -2500,0 ccw(c0,0) 0,-2500 ccw(c0,0) 2500,0 ccw(c0,0) 496.07,2450.29 ; 444.63,-1221.6 ccw(c0,0) 1221.6,-444.63 ; 444.63,1221.6 cw(c0,0) 1221.6,444.63
Bottom Solder:
  the board outline again, w100
[8] Board Outline:
  circle w10: c0,0 r1246.21
  text "CUTOUT" at -690,-130.83 h400

## Text inside footprints (layer, text, board x,y; h text height)
J2: Top Overlay "FRONT" at 1415,-1995.98 h50 r45
J3: [1] 3D Body Top "Edge" at 2447,488 h30 r270
J18: Top Overlay "FRONT" at 1887.84,-1523.14 h50 r45
U3: Top Overlay "1" at 250,1785 h100 r180